# EAGLE board attiny85 (EAGLE 9.6.2)
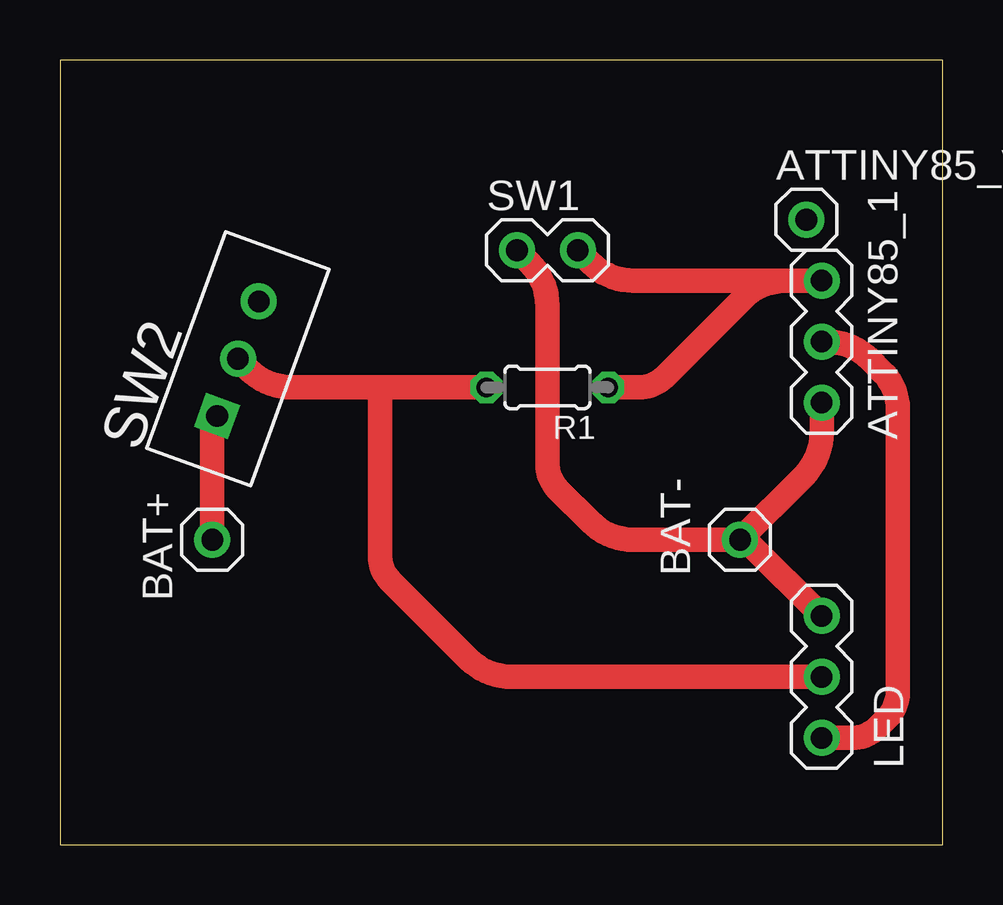
[diagram p0: board, top side]
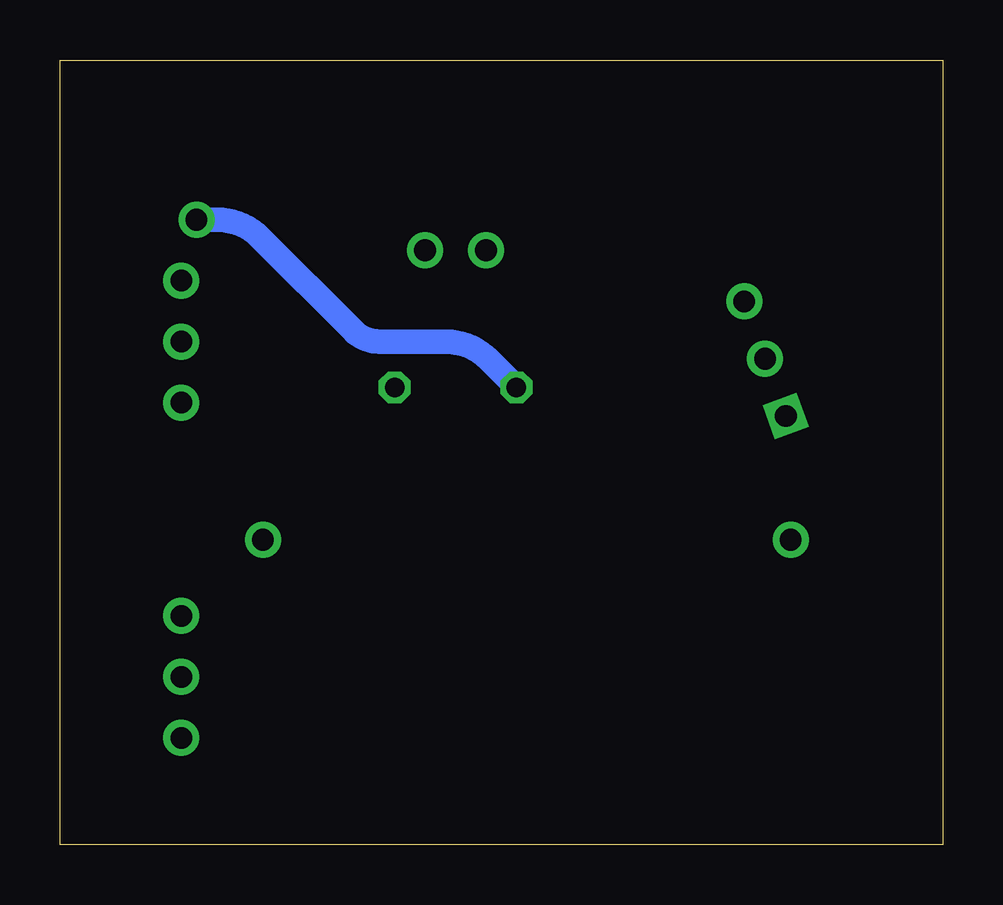
[diagram p1: board, bottom side, seen from below]

Size 36.81 x 32.69 mm. Coordinates in mm from the lower left corner, seen from the top.
Outline: 0,0 36.81,0 36.81,32.69 0,32.69 0,0
Copper layers (1*16): Top 0.035mm / dielectric 1.5mm / Bottom 0.035mm
Design rules "default": minimum track width 6mil, minimum drill 0.35mm, track to track 6mil, track to pad 6mil, pad to pad 6mil, via to via 6mil, smd to smd 6mil, copper to edge 40mil, drill to drill 6mil, minimum pad ring 10mil, minimum via ring 8mil, stop-mask expansion 4mil, vias tented up to drill 0mil, thermal gap 10mil

## Footprints (pad centres in the part's own frame; a part is rotated, then mirrored left to right if it is on the bottom)
PINHEAD-MA03-1 = drill 0.9 pad 1.5: 1 -1.27,0; 2 1.27,0; 3 3.81,0
PINHEAD-MA01-1 = drill 0.9 pad 1.5: 1 1.27,0
0204/5 = drill 0.813 octagon: 1 -2.54,0; 2 2.54,0
PINHEAD-MA02-1 = drill 0.9 pad 1.5: 1 -1.27,0; 2 1.27,0
SW3-1 = drill 0.9 pad 1.5 square: 1 -1.27,0 | drill 0.9 pad 1.5: 2 1.27,0; 3 3.81,0

## Placement (x,y rotation side)
ATTINY85_1  [PINHEAD-MA03-1]  31.75,19.68 90 top
ATTINY85_VCC  [PINHEAD-MA01-1]  29.84,26.04 0 top
BAT+  [PINHEAD-MA01-1]  5.08,12.7 0 top
BAT-  [PINHEAD-MA01-1]  27.08,12.7 0 top
LED  [PINHEAD-MA03-1]  31.75,8.25 270 top
R1  [0204/5]  20.32,19.05 180 top
SW1  [PINHEAD-MA02-1]  20.32,24.77 0 top
SW2  [SW3-1]  6.99,19.05 70 top

## Library data of the parts
ATTINY85_1 LED = ytani1; OC_FARNELL: unknown; OC_NEWARK: unknown
ATTINY85_VCC BAT+ BAT- SW1 = ytani1
R1 = rcl; SPICEPREFIX: R
SW2 = ytani1; MF: HiLetgo; URL_AMAZON: https://www.amazon.co.jp/gp/product/B01LYVYQNO/

## Nets
+3V3: BAT+.1 SW2.1
BAT+: ATTINY85_VCC.1 LED.2 R1.2 SW2.2
GND: ATTINY85_1.1 BAT-.1 LED.1 SW1.1
PB3: ATTINY85_1.3 R1.1 SW1.2
PB4: ATTINY85_1.2 LED.3

## Tracks (layer width: path | path; a pad name or v marks a point on that pad's centre or on a via)
+3V3
  Top 1.016: BAT+.1 6.35,17.37 arc-45 SW2.1
BAT+
  Top 1.016: SW2.2 7.87,19.79 arc45 9.66,19.05 13.34,19.05 | 13.34,19.05 R1.2 | 13.34,19.05 13.34,12.06 arc45 13.78,10.98 17.04,7.73 arc45 18.83,6.98 LED.2
  Bottom 1.016: R1.2 18.94,20.21 arc-45 20.74,20.95 23.49,20.95 arc45 24.58,21.4 28.47,25.29 arc-45 30.26,26.04 ATTINY85_VCC.1
GND
  Top 1.016: SW1.1 19.58,24.24 arc-45 20.32,22.44 20.32,15.88 arc45 20.77,14.79 22.12,13.44 arc45 23.91,12.7 BAT-.1 | BAT-.1 arc-45 28.73,12.54 LED.1 | BAT-.1 31.01,15.36 arc45 31.75,17.15 ATTINY85_1.1
PB3
  Top 1.016: R1.1 24.13,19.05 arc45 25.21,19.5 28.47,22.75 arc-45 30.26,23.49 ATTINY85_1.3 23.91,23.49 arc-45 22.12,24.24 SW1.2
PB4
  Top 1.016: LED.3 33.02,4.44 arc45 34.1,4.89 34.48,5.27 arc45 34.92,6.35 34.92,18.15 arc45 34.29,19.68 33.76,20.21 arc45 31.97,20.95 ATTINY85_1.2